# EAGLE board fdc6326l_breakout_minimal_panel (EAGLE 6.5.0)
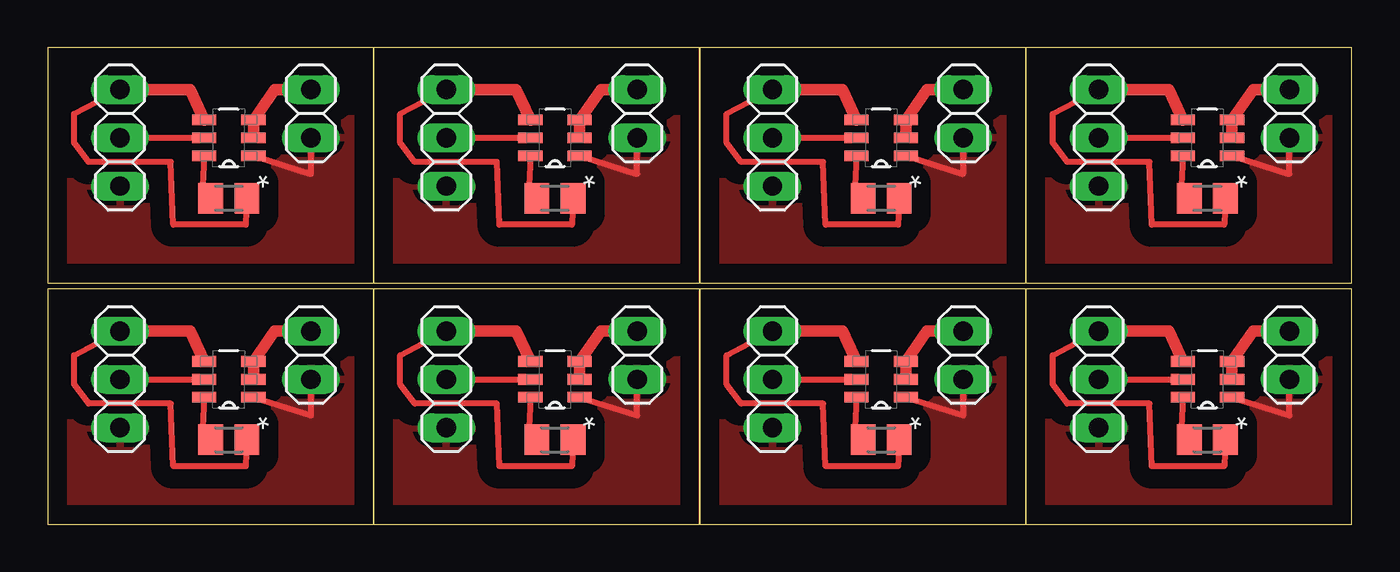
[diagram p0: board, top side]

Size 68.56 x 25.07 mm. Coordinates in mm from the lower left corner, seen from the top.
Outline: 0,0 17.12,0 17.12,12.37 0,12.37 0,0
Outline: 17.14,0 34.27,0 34.27,12.37 17.14,12.37 17.14,0
Outline: 34.29,0 51.41,0 51.41,12.37 34.29,12.37 34.29,0
Outline: 51.44,0 68.56,0 68.56,12.37 51.44,12.37 51.44,0
Outline: 0,12.7 17.12,12.7 17.12,25.07 0,25.07 0,12.7
Outline: 17.14,12.7 34.27,12.7 34.27,25.07 17.14,25.07 17.14,12.7
Outline: 34.29,12.7 51.41,12.7 51.41,25.07 34.29,25.07 34.29,12.7
Outline: 51.44,12.7 68.56,12.7 68.56,25.07 51.44,25.07 51.44,12.7
Copper layers 1: Top 0.035mm
Design rules "1l": minimum track width 6mil, minimum drill 24mil, track to track 8mil, track to pad 8mil, pad to pad 8mil, via to via 8mil, smd to smd 8mil, copper to edge 40mil, drill to drill 8mil, minimum pad ring 10mil, minimum via ring 8mil, stop-mask expansion 4mil, vias tented up to drill 0mil, thermal gap 10mil

## Footprints (pad centres in the part's own frame; a part is rotated, then mirrored left to right if it is on the bottom)
1X03 = drill 1.016 long: 1 -2.54,0; 2 0,0; 3 2.54,0
1X02 = drill 1.016 long: 1 -1.27,0; 2 1.27,0
M0805 = smd 1.3 x 1.6: 1 -0.95,0; 2 0.95,0
SOT95P280X110-6N = smd 1.27 x 0.559: 1 -1.295,0.94; 2 -1.295,0; 3 -1.295,-0.94; 4 1.295,-0.94; 5 1.295,0; 6 1.295,0.94

## Placement (x,y rotation side)
JP1  [1X03]  3.81,7.62 270 top
JP2  [1X02]  13.84,8.89 270 top
JP3  [1X03]  20.95,7.62 270 top
JP4  [1X02]  30.99,8.89 270 top
JP5  [1X03]  38.1,7.62 270 top
JP6  [1X02]  48.13,8.89 270 top
JP7  [1X03]  55.24,7.62 270 top
JP8  [1X02]  65.28,8.89 270 top
JP9  [1X03]  3.81,20.32 270 top
JP10  [1X02]  13.84,21.59 270 top
JP11  [1X03]  20.95,20.32 270 top
JP12  [1X02]  30.99,21.59 270 top
JP13  [1X03]  38.1,20.32 270 top
JP14  [1X02]  48.13,21.59 270 top
JP15  [1X03]  55.24,20.32 270 top
JP16  [1X02]  65.28,21.59 270 top
R1  100k  [M0805]  9.53,4.45 180 top
R2  100k  [M0805]  26.67,4.45 180 top
R3  100k  [M0805]  43.81,4.45 180 top
R4  100k  [M0805]  60.96,4.45 180 top
R5  100k  [M0805]  9.53,17.14 180 top
R6  100k  [M0805]  26.67,17.14 180 top
R7  100k  [M0805]  43.81,17.14 180 top
R8  100k  [M0805]  60.96,17.14 180 top
U1  FDC6326L  [SOT95P280X110-6N]  9.53,7.62 180 top
U2  FDC6326L  [SOT95P280X110-6N]  26.67,7.62 180 top
U3  FDC6326L  [SOT95P280X110-6N]  43.81,7.62 180 top
U4  FDC6326L  [SOT95P280X110-6N]  60.96,7.62 180 top
U5  FDC6326L  [SOT95P280X110-6N]  9.53,20.32 180 top
U6  FDC6326L  [SOT95P280X110-6N]  26.67,20.32 180 top
U7  FDC6326L  [SOT95P280X110-6N]  43.81,20.32 180 top
U8  FDC6326L  [SOT95P280X110-6N]  60.96,20.32 180 top

## Library data of the parts
JP1-JP16 = pinhead
R1-R8 = rcl
U1-U8 = Fairchild_By_element14_Batch_1; MPN: FDC6326L; OC_FARNELL: 1706325; OC_NEWARK: 58K1423; PACKAGE: SSOT-23-6; SUPPLIER: FAIRCHILD SEMICONDUCTOR

## Nets
GND: JP1.3 JP2.2 U1.1
GND1: JP3.3 JP4.2 U2.1
GND2: JP5.3 JP6.2 U3.1
GND3: JP7.3 JP8.2 U4.1
GND4: JP9.3 JP10.2 U5.1
GND5: JP11.3 JP12.2 U6.1
GND6: JP13.3 JP14.2 U7.1
GND7: JP15.3 JP16.2 U8.1
N$1: R2.2 U2.6
N$2: R3.2 U3.6
N$3: R1.2 U1.6
N$4: R4.2 U4.6
N$5: R5.2 U5.6
N$6: R6.2 U6.6
N$7: R7.2 U7.6
N$8: R8.2 U8.6
ONOFF: JP1.2 U1.5
ONOFF1: JP3.2 U2.5
ONOFF2: JP5.2 U3.5
ONOFF3: JP7.2 U4.5
ONOFF4: JP9.2 U5.5
ONOFF5: JP11.2 U6.5
ONOFF6: JP13.2 U7.5
ONOFF7: JP15.2 U8.5
VCC: JP1.1 R1.1 U1.4
VCC1: JP3.1 R2.1 U2.4
VCC2: JP5.1 R3.1 U3.4
VCC3: JP7.1 R4.1 U4.4
VCC4: JP9.1 R5.1 U5.4
VCC5: JP11.1 R6.1 U6.4
VCC6: JP13.1 R7.1 U7.4
VCC7: JP15.1 R8.1 U8.4
VOUT: JP2.1 U1.2 U1.3
VOUT1: JP4.1 U2.2 U2.3
VOUT2: JP6.1 U3.2 U3.3
VOUT3: JP8.1 U4.2 U4.3
VOUT4: JP10.1 U5.2 U5.3
VOUT5: JP12.1 U6.2 U6.3
VOUT6: JP14.1 U7.2 U7.3
VOUT7: JP16.1 U8.2 U8.3

## Tracks (layer width: path | path; a pad name or v marks a point on that pad's centre or on a via)
GND
  Top 0.305: U1.1 13.84,5.71 JP2.2
  pour Top (isolate 1.016): 0,12.7 0,0 17.14,0 17.14,12.7
GND1
  Top 0.305: U2.1 30.99,5.71 JP4.2
  pour Top (isolate 1.016): 17.14,12.7 17.14,0 34.29,0 34.29,12.7
GND2
  Top 0.305: U3.1 48.13,5.71 JP6.2
  pour Top (isolate 1.016): 34.29,12.7 34.29,0 51.44,0 51.44,12.7
GND3
  Top 0.305: U4.1 65.28,5.71 JP8.2
  pour Top (isolate 1.016): 51.44,12.7 51.44,0 68.58,0 68.58,12.7
GND4
  Top 0.305: U5.1 13.84,18.41 JP10.2
  pour Top (isolate 1.016): 0,25.4 0,12.7 17.14,12.7 17.14,25.4
GND5
  Top 0.305: U6.1 30.99,18.41 JP12.2
  pour Top (isolate 1.016): 17.14,25.4 17.14,12.7 34.29,12.7 34.29,25.4
GND6
  Top 0.305: U7.1 48.13,18.41 JP14.2
  pour Top (isolate 1.016): 34.29,25.4 34.29,12.7 51.44,12.7 51.44,25.4
GND7
  Top 0.305: U8.1 65.28,18.41 JP16.2
  pour Top (isolate 1.016): 51.44,25.4 51.44,12.7 68.58,12.7 68.58,25.4
N$1
  Top 0.305: U2.6 25.27,4.57 R2.2
N$2
  Top 0.305: U3.6 42.42,4.57 R3.2
N$3
  Top 0.305: U1.6 8.13,4.57 R1.2
N$4
  Top 0.305: U4.6 59.56,4.57 R4.2
N$5
  Top 0.305: U5.6 8.13,17.27 R5.2
N$6
  Top 0.305: U6.6 25.27,17.27 R6.2
N$7
  Top 0.305: U7.6 42.42,17.27 R7.2
N$8
  Top 0.305: U8.6 59.56,17.27 R8.2
ONOFF
  Top 0.305: JP1.2 U1.5
ONOFF1
  Top 0.305: JP3.2 U2.5
ONOFF2
  Top 0.305: JP5.2 U3.5
ONOFF3
  Top 0.305: JP7.2 U4.5
ONOFF4
  Top 0.305: JP9.2 U5.5
ONOFF5
  Top 0.305: JP11.2 U6.5
ONOFF6
  Top 0.305: JP13.2 U7.5
ONOFF7
  Top 0.305: JP15.2 U8.5
VCC
  Top 0.305: R1.1 10.41,3.05 6.6,3.05 6.48,6.35 2.16,6.35 1.4,7.37 1.4,8.89 JP1.1
  Top 0.61: JP1.1 7.49,10.16 U1.4
VCC1
  Top 0.305: R2.1 27.56,3.05 23.75,3.05 23.62,6.35 19.3,6.35 18.54,7.37 18.54,8.89 JP3.1
  Top 0.61: JP3.1 24.64,10.16 U2.4
VCC2
  Top 0.305: R3.1 44.7,3.05 40.89,3.05 40.77,6.35 36.45,6.35 35.69,7.37 35.69,8.89 JP5.1
  Top 0.61: JP5.1 41.78,10.16 U3.4
VCC3
  Top 0.305: R4.1 61.85,3.05 58.04,3.05 57.91,6.35 53.59,6.35 52.83,7.37 52.83,8.89 JP7.1
  Top 0.61: JP7.1 58.93,10.16 U4.4
VCC4
  Top 0.305: R5.1 10.41,15.75 6.6,15.75 6.48,19.05 2.16,19.05 1.4,20.07 1.4,21.59 JP9.1
  Top 0.61: JP9.1 7.49,22.86 U5.4
VCC5
  Top 0.305: R6.1 27.56,15.75 23.75,15.75 23.62,19.05 19.3,19.05 18.54,20.07 18.54,21.59 JP11.1
  Top 0.61: JP11.1 24.64,22.86 U6.4
VCC6
  Top 0.305: R7.1 44.7,15.75 40.89,15.75 40.77,19.05 36.45,19.05 35.69,20.07 35.69,21.59 JP13.1
  Top 0.61: JP13.1 41.78,22.86 U7.4
VCC7
  Top 0.305: R8.1 61.85,15.75 58.04,15.75 57.91,19.05 53.59,19.05 52.83,20.07 52.83,21.59 JP15.1
  Top 0.61: JP15.1 58.93,22.86 U8.4
VOUT
  Top 0.61: U1.2 U1.3 11.94,10.16 JP2.1
VOUT1
  Top 0.61: U2.2 U2.3 29.08,10.16 JP4.1
VOUT2
  Top 0.61: U3.2 U3.3 46.23,10.16 JP6.1
VOUT3
  Top 0.61: U4.2 U4.3 63.37,10.16 JP8.1
VOUT4
  Top 0.61: U5.2 U5.3 11.94,22.86 JP10.1
VOUT5
  Top 0.61: U6.2 U6.3 29.08,22.86 JP12.1
VOUT6
  Top 0.61: U7.2 U7.3 46.23,22.86 JP14.1
VOUT7
  Top 0.61: U8.2 U8.3 63.37,22.86 JP16.1